# Altium PCB pcb.PcbDoc
Units mil, origin at the board's own origin, x right, y up, seen from the top; angles counter-clockwise.
Board outline 6000 x 4000 mil, 2 copper layers (Top Layer, Bottom Layer); 6 components, 11 nets, 68 pads, 0 vias.
Unrouted connection lines stored in the file: 8.
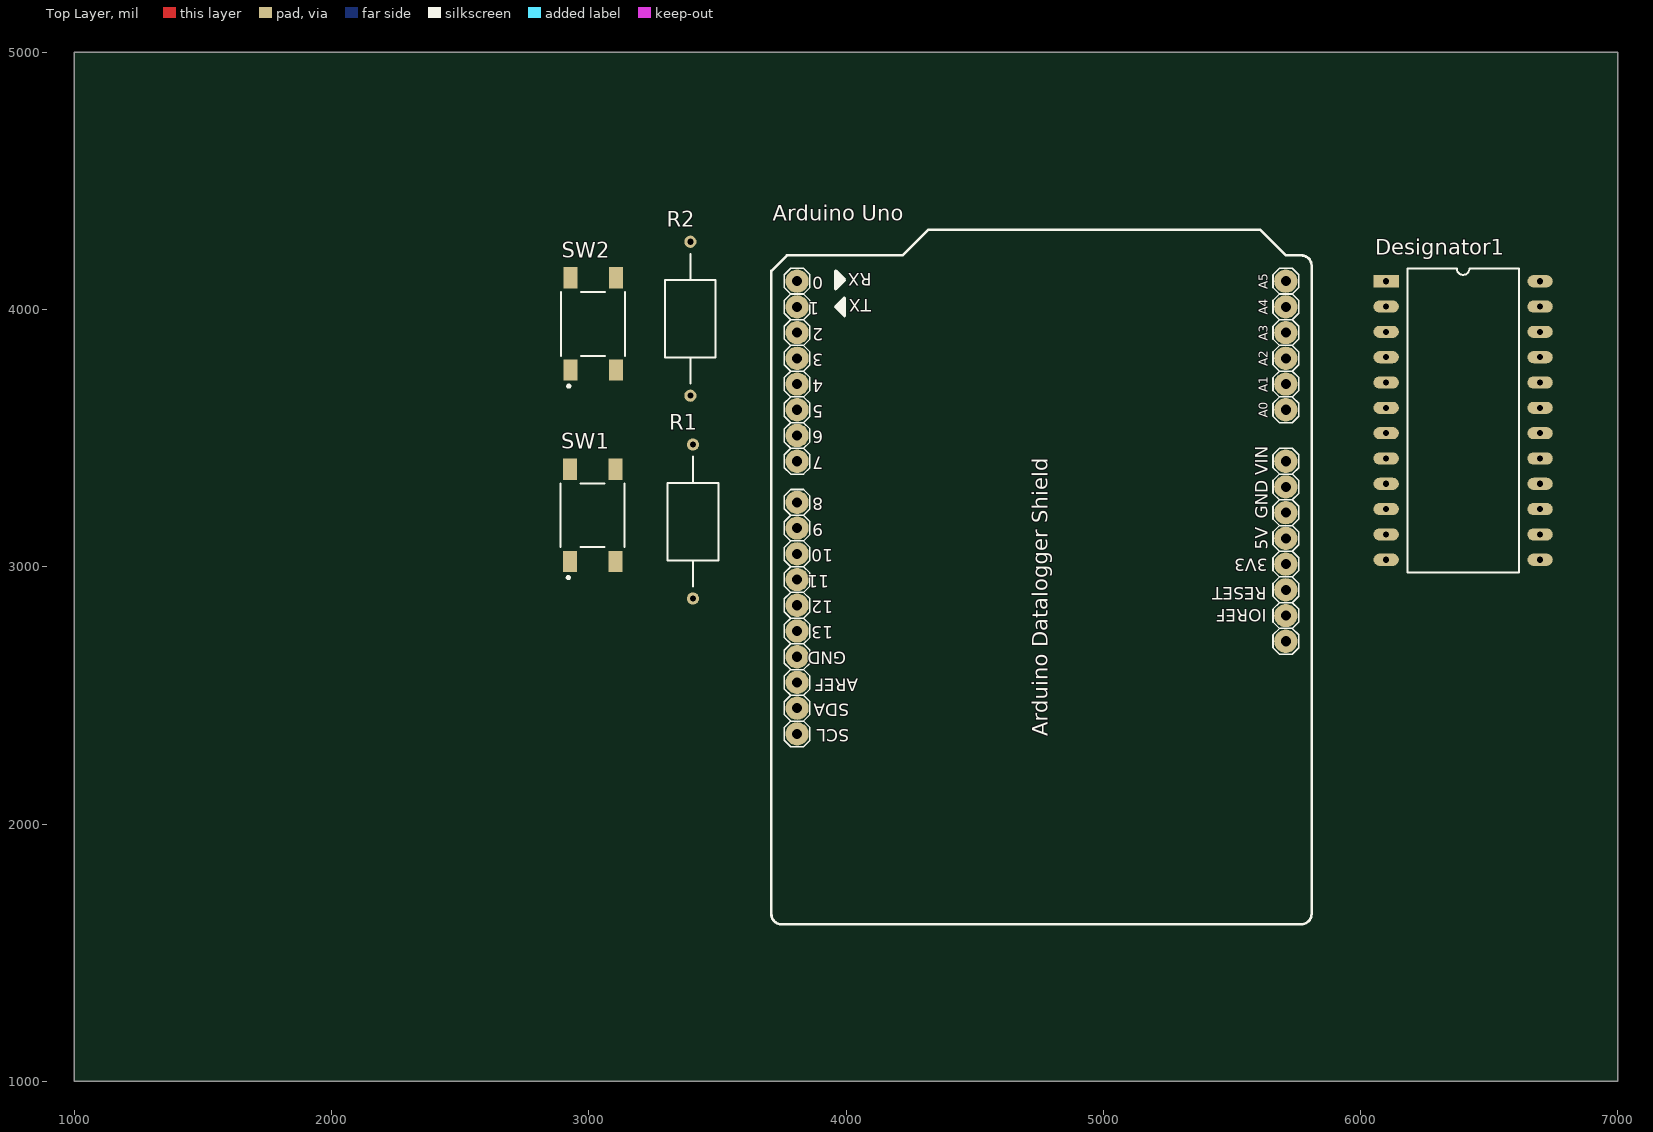
[diagram p0: Top Layer view]
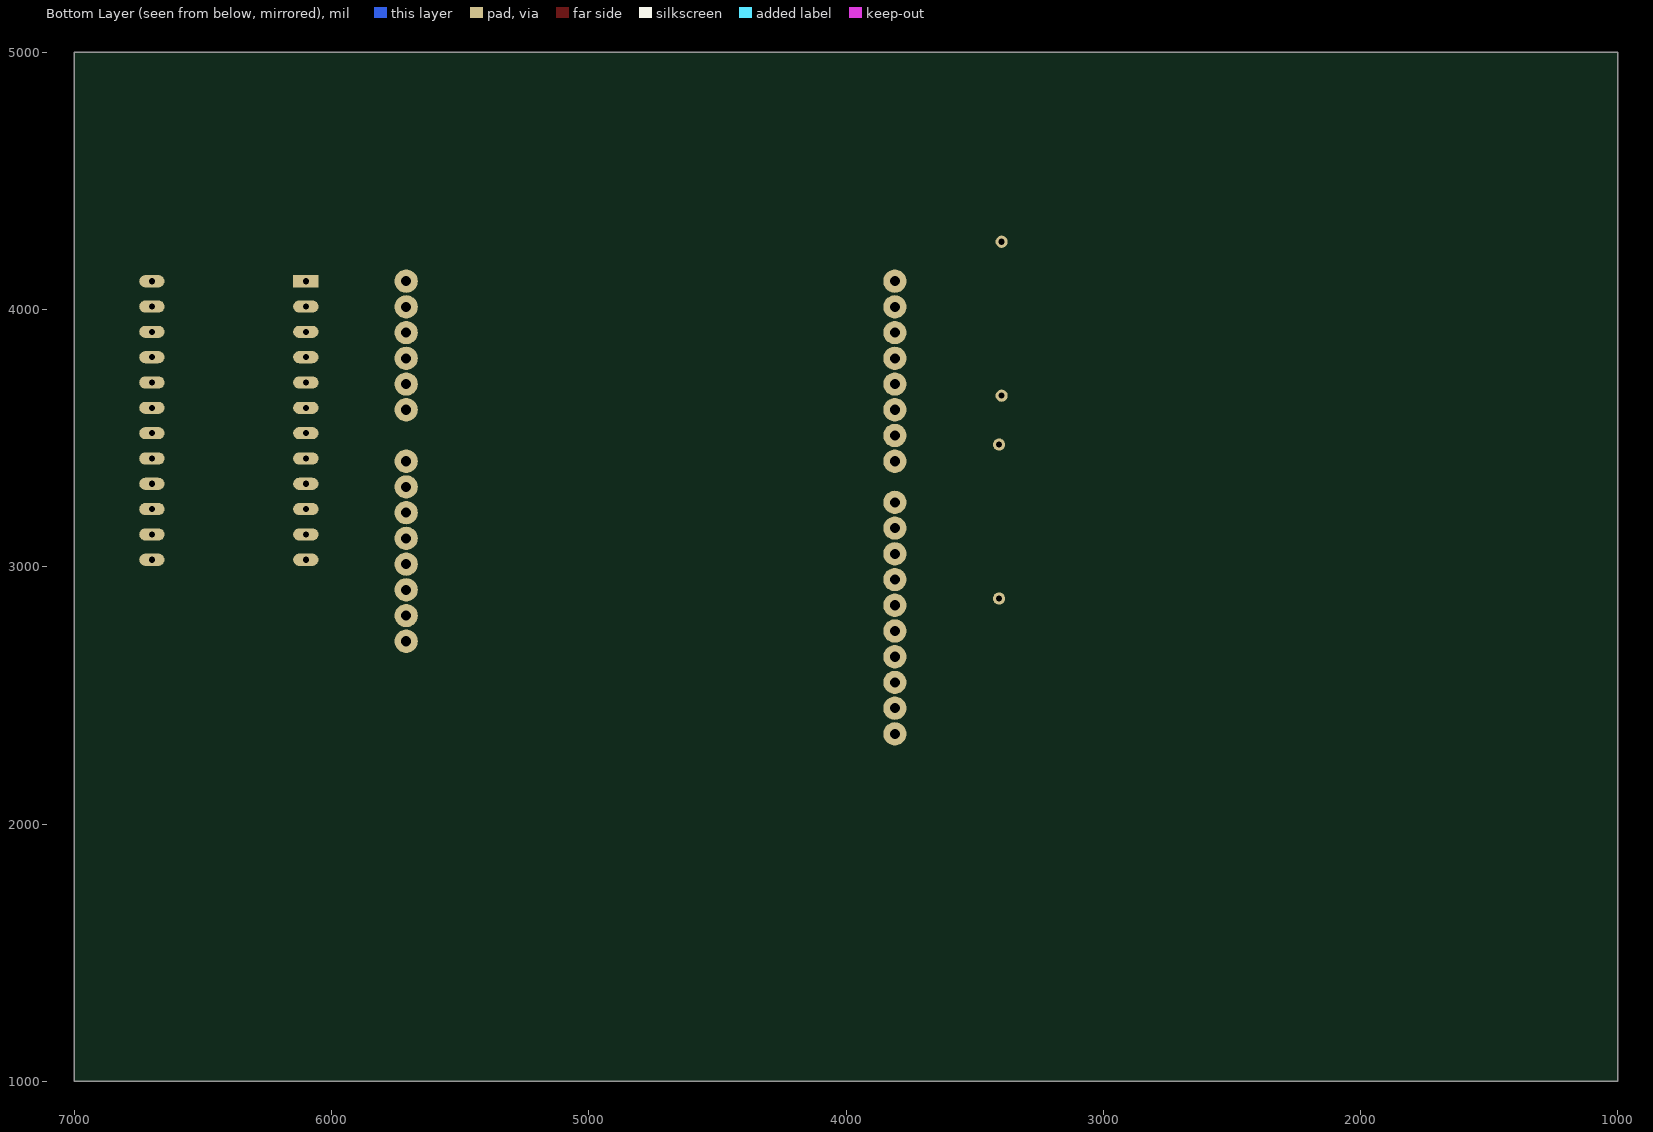
[diagram p1: Bottom Layer view, seen from below]

## Layer stack, top to bottom
Top Solder: solder mask 0.4, Solder Resist, Dk 3.5
Top Layer: signal copper 1.4
Dielectric 1: dielectric 12.6, FR-4, Dk 4.8
Bottom Layer: signal copper 1.4
Bottom Solder: solder mask 0.4, Solder Resist, Dk 3.5

## Board outline
1000,1000 7000,1000 7000,5000 1000,5000

## Design rules (kind name [scope] priority, off if disabled: settings)
Clearance [All] p1: gap=10 ignorepadtopadclearanceinfootprint=FALSE except(0: Arc-Hole Track-Hole SMDPad-Hole THPad-Hole Via-Hole Fill-Hole Poly-Hole Region-Hole Text-Hole)
PolygonConnect [All] p1: connectstyle=Relief reliefconductorwidth=10 reliefentries=4 polygonreliefangle="90 Angle" airgapwidth=10
RoutingVias [All] p1: holewidth=28 width=50 viastyle="Through Hole" minholewidth=28 minwidth=50 maxholewidth=28 maxwidth=50
SolderMaskExpansion [All] p1: expansion=4 istentingtop=FALSE
Width [All] p1: maxlimit=10 minlimit=10 preferedwidth=10
30 further rules are at their usual default settings.

## Components (designator, comment, footprint, x,y, rotation, side; value= is the part's Value field where it differs from the comment)
"Arduino Uno" "ARDUINO UNO" "Arduino Uno" 4765,3030 r90 top
Designator1 "Comment" MAX7219 6100,4110 r0 top
R1 "CF14JT1K00" "1k ohm" 3405,2876.57 r90 top
R2 "CF14JT1K00" "1k ohm" 3395,3665 r90 top
SW1 "4-1437565-1" "Push Button" 3015,3200 r90 top
SW2 "4-1437565-1" "Push Button" 3016.81,3944.13 r90 top

## Footprints (in the part's own frame and the unit in brackets; to place one, negate y for a bottom-side part, rotate by r counter-clockwise, add the part's x,y. Pads: shape width x height; smd on the part's side, far side on the other; paste and mask are expansions set on the pad)
"1k ohm" [mm]
  round 1.2 hole 0.6: 1(0,0) 2(15.2,0)
  silkscreen extent 1.2,-2.5 14,2.5
"Arduino Uno" [mm]
  round 2.3 hole 1: 0(27.44,24.26) 1(24.9,24.26) 2(22.36,24.26) 3(19.82,24.26) 3.3V(-0.5,-24) 4(17.28,24.26) 5(14.74,24.26) 5V(2.04,-24) 6(12.2,24.26) 7(9.66,24.26) 8(5.596,24.26) 9(3.056,24.26) 10(0.516,24.26) 11(-2.024,24.26) 12(-4.564,24.26) 13(-7.104,24.26) A0(14.74,-24) A1(17.28,-24) A2(19.82,-24) A3(22.36,-24) A4(24.9,-24) A5(27.44,-24) AREF(-12.184,24.26) GND1(7.12,-24) GND2(4.58,-24) GND3(-9.644,24.26) IOREF(-5.58,-24) NC(-8.12,-24) RST(-3.04,-24) SCL(-17.264,24.26) SDA(-14.724,24.26) Vin(9.66,-24)
  silkscreen extent -36.06,-26.54 32.52,26.8
MAX7219 [mm]
  rect 2.5x1.2 hole 0.6: 1(0,0)
  oval 2.5x1.2 hole 0.6: 2(0,-2.5) 3(0,-5) 4(0,-7.5) 5(0,-10) 6(0,-12.5) 7(0,-15) 8(0,-17.5) 9(0,-20) 10(0,-22.5) 11(0,-25) 12(0,-27.5) 13(15.2,-27.5) 14(15.2,-25) 15(15.2,-22.5) 16(15.2,-20) 17(15.2,-17.5) 18(15.2,-15) 19(15.2,-12.5) 20(15.2,-10) 21(15.2,-7.5) 22(15.2,-5) 23(15.2,-2.5) 24(15.2,0)
  silkscreen extent 2.08,-28.75 13.12,1.25
"Push Button" [mm]
  rect 2.1x1.38 smd paste+0 mask+0: 1(-4.55,2.24) 2(4.55,2.24) 3(-4.55,-2.24) 4(4.55,-2.24)
  silkscreen extent -6.27,-3.15 3.15,3.15

## Part data
R1 R2: "Res Carbon Film 1K Ohm 5% 1/4W -400ppm/°C to 0ppm/°C Conformal AXL Thru-Hole T/R", Manufacturer="Stackpole Electronics", Category="Through-Hole Resistors", ComponentLink1Description=http://components.arrow.com/part/dataview/27620077S9848643N1174?src-supplier=Arrow+Electronics, ComponentLink1URL=http://components.arrow.com/part/dataview/27620077S9848643N1174?src-supplier=Arrow+Electronics, ComponentLink2Description=https://www.seielect.com/catalog/SEI-CF_CFM.pdf?src-supplier=Avnet, ComponentLink2URL=https://www.seielect.com/catalog/SEI-CF_CFM.pdf?src-supplier=Avnet, ComponentLink3Description=https://www.seielect.com/catalog/SEI-Packaging.pdf?src-supplier=Digikey, ComponentLink3URL=https://www.seielect.com/catalog/SEI-Packaging.pdf?src-supplier=Digikey, ComponentLink4Description=https://www.seielect.com/Catalog/SEI-CF_CFM.pdf?src-supplier=Digikey, ComponentLink4URL=https://www.seielect.com/Catalog/SEI-CF_CFM.pdf?src-supplier=Digikey, ComponentLink5Description=http://www.seielect.com/Catalog/SEI-CF_CFM.pdf?src-supplier=Future+Electronics, ComponentLink5URL=http://www.seielect.com/Catalog/SEI-CF_CFM.pdf?src-supplier=Future+Electronics, ComponentLink6Description=https://www.verical.com/server-webapp/html/getDatasheet?partID=360403&src-supplier=Verical, ComponentLink6URL=https://www.verical.com/server-webapp/html/getDatasheet?partID=360403&src-supplier=Verical, ComponentLink7Description=https://datasheet.octopart.com/CF14JT1K00-Stackpole-Electronics-datasheet-8360004.pdf?src-supplier=Future+Electronics, ComponentLink7URL=https://datasheet.octopart.com/CF14JT1K00-Stackpole-Electronics-datasheet-8360004.pdf?src-supplier=Future+Electronics, ComponentLink8Description=https://datasheet.octopart.com/CF14JT1K00-Stackpole-Electronics-datasheet-32780772.pdf?src-supplier=Master+Electronics, ComponentLink8URL=https://datasheet.octopart.com/CF14JT1K00-Stackpole-Electronics-datasheet-32780772.pdf?src-supplier=Master+Electronics, Manufacturer Part Number=CF14JT1K00, Pricing="5000=0.0063, 10000=0.00621, 20000=0.00612, 30000=0.00603, 40000=0.00594, 50000=0.00585, 500000=0.00576 (USD)", RoHS=Yes, Stock=5000, Supplier=Avnet, Supplier Part Number=CF14JT1K00
SW1 SW2: "Switch Tactile OFF (ON) SPST Round Button Gull Wing 0.05A 12VDC 1.57N SMD Loose Piece", Case/Package=98Case, Color=46Colour, Contact Current Rating=50mA, Contact Resistance=100mR, Insulation Resistance=100MR, Manufacturer="TE Connectivity", Max Operating Temperature=85°C, Max Voltage Rating (DC)=12V, Min Operating Temperature=-35°C, Operating Force=1.57N, Supplier Part Number=4791508P, Voltage Rating=24V, Actuator Length=1.397mm, Actuator Material=4302ConductorMaterial, Category="Pushbutton Switches", ComponentLink1Description=https://datasheet.octopart.com/FSM4JSMA-Alcoswitch-datasheet-14569010.pdf?src-supplier=Newark, ComponentLink1URL=https://datasheet.octopart.com/FSM4JSMA-Alcoswitch-datasheet-14569010.pdf?src-supplier=Newark, ComponentLink2Description=https://datasheet.octopart.com/4-1437565-1-TE-Connectivity-datasheet-140613590.pdf?src-supplier=TME, ComponentLink2URL=https://datasheet.octopart.com/4-1437565-1-TE-Connectivity-datasheet-140613590.pdf?src-supplier=TME, Contact Material=151ConductorMaterial, Contact Plating=159ConductorMaterial, Current Rating=50mA, Height=5.38mm, Illumination Type=4479,4480IlluminationType, Lead Free=5697LeadFree, Length=6mm, Manufacturer Part Number=4-1437565-1, Mounting Technology=8Mount, Number of Positions=2NUMBER, Orientation=5491OrientationType, Packaging=14Packaging, Pricing="200=0.193, 500=0.192, 1000=0.182, 2000=0.164 (GBP)", Reach SVHC Compliant=4187SVHC, RoHS=Yes, Stock=25850, Supplier=Rs, Switch Function=6033SwitchFunction, Switch Travel=250um, Termination=4594ConnectorType, Throw Configuration="255Throw Configuration", Type=6189ProductType, Voltage Rating (DC)=24V, Width=6mm

## Nets (pads, with @x,y where several pads share a name; then routed paths per layer and width w, separated by ;. In a path a pad name is that pad's centre, name@x,y a point inside that pad or via, vN(x,y) a via of type N, cw(c..) or ccw(c..) an arc to the next point about the centre after c; other vN are vias at no path point)
GND: "Arduino Uno.GND1" R1.2 R2.2
Net_1: "Arduino Uno.12"
Net_4: "Arduino Uno.GND2"
Net_12: "Arduino Uno.10"
Net_13: "Arduino Uno.11"
Net_19: "Arduino Uno.5V"
"NetArduino Uno_2": "Arduino Uno.2" SW2.2
"NetArduino Uno_3": "Arduino Uno.3" SW1.2
NetR1_1: R1.1 SW1.4
NetR2_1: R2.1 SW2.4
VCC: "Arduino Uno.Vin" SW1.3 SW2.3
pads on no net: "Arduino Uno.0" "Arduino Uno.1" "Arduino Uno.3.3V" "Arduino Uno.4" "Arduino Uno.5" "Arduino Uno.6" "Arduino Uno.7" "Arduino Uno.8" "Arduino Uno.9" "Arduino Uno.13" "Arduino Uno.A0" "Arduino Uno.A1" "Arduino Uno.A2" "Arduino Uno.A3" "Arduino Uno.A4" "Arduino Uno.A5" "Arduino Uno.AREF" "Arduino Uno.GND3" "Arduino Uno.IOREF" "Arduino Uno.NC" "Arduino Uno.RST" "Arduino Uno.SCL" "Arduino Uno.SDA" Designator1.1 Designator1.2 Designator1.3 Designator1.4 Designator1.5 Designator1.6 Designator1.7 Designator1.8 Designator1.9 Designator1.10 Designator1.11 Designator1.12 Designator1.13 Designator1.14 Designator1.15 Designator1.16 Designator1.17 Designator1.18 Designator1.19 Designator1.20 Designator1.21 Designator1.22 Designator1.23 Designator1.24 SW1.1 SW2.1

## Text inside footprints (layer, text, board x,y; h text height)
"Arduino Uno": Top Overlay "5V" at 5639.88,3065.32 h47.6 r90; Top Overlay "A0" at 5638.88,3579.32 h34 r90; Top Overlay "AREF" at 4048.36,2564.9 h47.6 r180; Top Overlay "GND" at 4001.77,2668.9 h47.6 r180; Top Overlay "RESET" at 5634.88,2920.32 h47.6 r180; Top Overlay "3V3" at 5639.88,3030.32 h47.6 r180; Top Overlay "A1" at 5638.88,3679.32 h34 r90; Top Overlay "A2" at 5638.88,3779.32 h34 r90; Top Overlay "A3" at 5638.88,3879.32 h34 r90; Top Overlay "A4" at 5638.88,3979.32 h34 r90; Top Overlay "A5" at 5638.88,4079.32 h34 r90; Top Overlay "VIN" at 5639.88,3355.32 h47.6 r90; Top Overlay "GND" at 5639.88,3186.32 h47.6 r90; Top Overlay "IOREF" at 5634.88,2835.32 h47.6 r180; Top Overlay "TX" at 4098.88,4040.32 h47.6 r180; Top Overlay "RX" at 4099.88,4140.31 h47.6 r180; Top Overlay "13" at 3951.26,2767.9 h47.6 r180; Top Overlay "12" at 3951.26,2867.9 h47.6 r180; Top Overlay "11" at 3935.4,2967.9 h47.6 r180; Top Overlay "10" at 3951.26,3067.9 h47.6 r180; Top Overlay "9" at 3911.61,3167.9 h47.6 r180; Top Overlay "8" at 3911.61,3267.9 h47.6 r180; Top Overlay "7" at 3911.61,3427.9 h47.6 r180; Top Overlay "6" at 3911.61,3527.9 h47.6 r180; Top Overlay "5" at 3911.61,3627.9 h47.6 r180; Top Overlay "4" at 3911.61,3727.9 h47.6 r180; Top Overlay "3" at 3911.61,3827.9 h47.6 r180; Top Overlay "2" at 3911.61,3927.9 h47.6 r180; Top Overlay "1" at 3895.74,4027.9 h47.6 r180; Top Overlay "0" at 3911.61,4127.9 h47.6 r180; Top Overlay "SCL" at 4013.03,2368.58 h47.6 r180; Top Overlay "SDA" at 4013.54,2468.13 h47.6 r180; Top Overlay "Arduino Datalogger Shield" at 4784.69,2341.02 h60 r90